# Altium PCB PCB1.pcbdoc
Units mil, origin at the board's own origin, x right, y up, seen from the top; angles counter-clockwise.
Board outline 4812.87 x 3579 mil, 2 copper layers (Top Layer, Bottom Layer); 58 components, 71 nets, 255 pads, 1 vias.
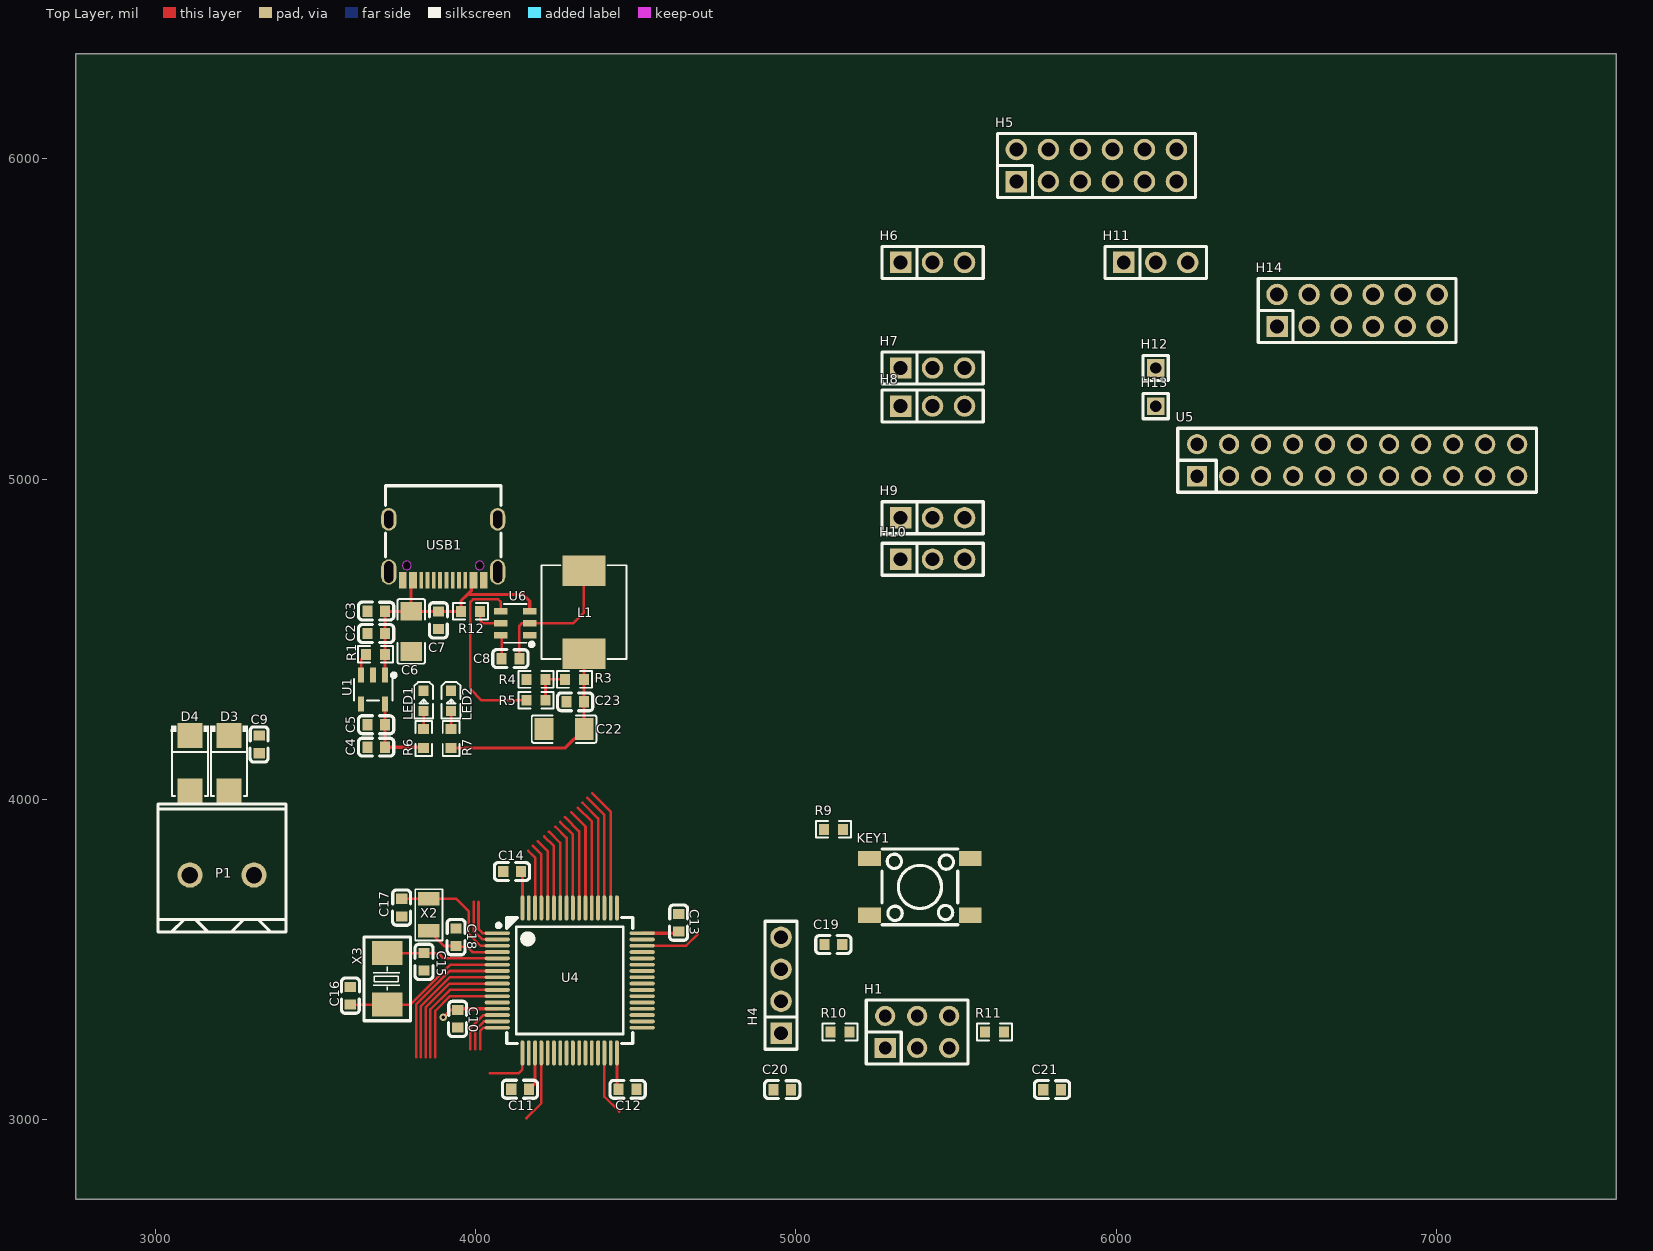
[diagram p0: Top Layer view]
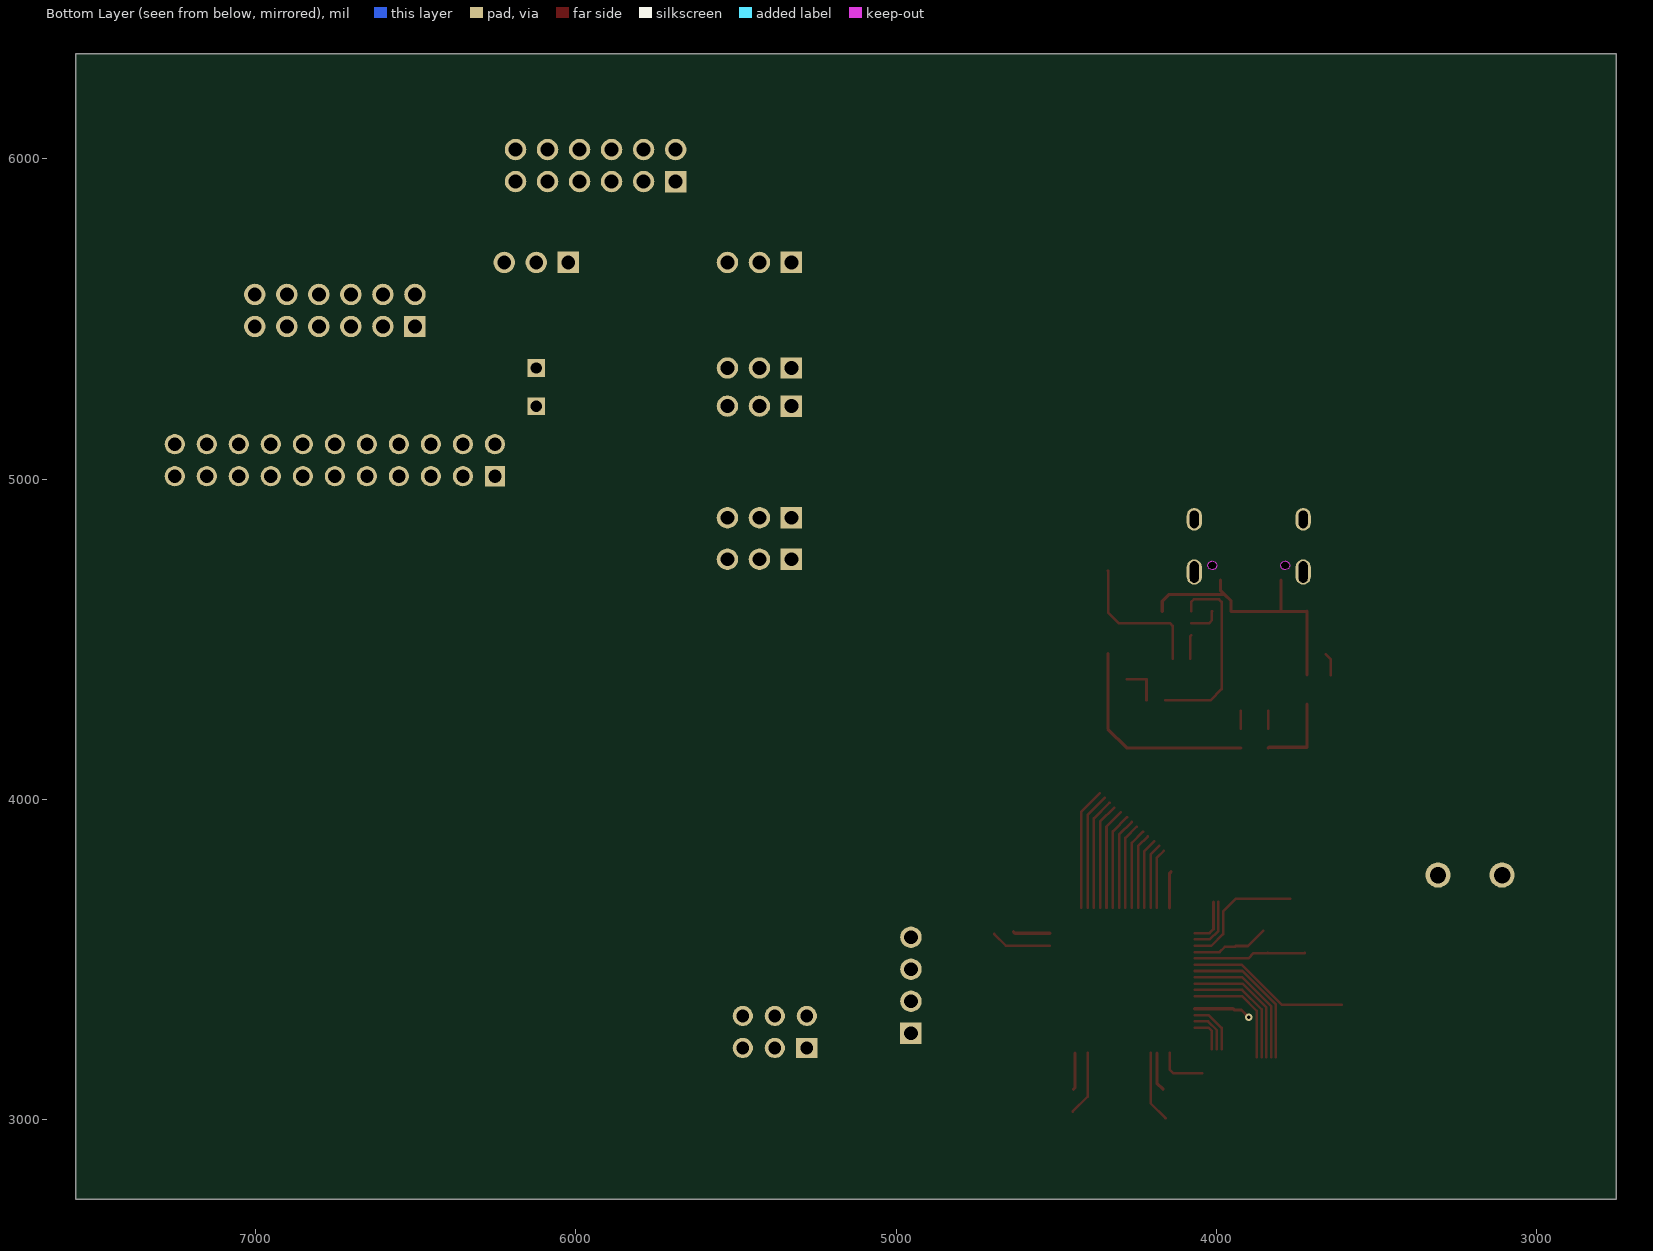
[diagram p1: Bottom Layer view, seen from below]

## Layer stack, top to bottom
Top Layer: signal copper (thickness not stored)
Dielectric: dielectric 12.6, FR-4, Dk 4.8
Bottom Layer: signal copper (thickness not stored)

## Board outline
7562.87,2750 2750,2750 2750,6329 7562.87,6329

## Components (designator, comment, footprint, x,y, rotation, side; value= is the part's Value field where it differs from the comment)
C2 "CAP_0603" C0603 3689.12,4517.44 r0 top
C3 "CAP_0603" C0603 3689.12,4587.44 r0 top
C4 "CAP_0603" C0603 3689.12,4162.44 r0 top
C5 "CAP_0603" C0603 3689.12,4232.44 r0 top
C6 "CAP_1206" C1206 3798.54,4524 r90 top
C7 "CAP_0603" C0603 3883.54,4559.14 r90 top
C8 "CAP_0603" C0603 4108.54,4439 r0 top
C9 "CAP_0603" C0603 3323.54,4171.18 r90 top
C10 "CAP_0603" C0603 3943.54,3314 r90 top
C11 "CAP_0603" C0603 4138.54,3094 r0 top
C12 "CAP_0603" C0603 4473.96,3093.89 r180 top
C13 "CAP_0603" C0603 4633.54,3614 r270 top
C14 "CAP_0603" C0603 4113.54,3774 r0 top
C15 "CAP_0603" C0603 3838.54,3492.25 r90 top
C16 "CAP_0603" C0603 3608.54,3385.95 r270 top
C17 "CAP_0603" C0603 3768.54,3661.64 r90 top
C18 "CAP_0603" C0603 3938.54,3569 r270 top
C19 "CAP_0603" C0603 5117.19,3545.97 r0 top
C20 "CAP_0603" C0603 4957.57,3092.98 r0 top
C21 "CAP_0603" C0603 5800.12,3092.98 r0 top
C22 "CAP_1206" C1206 4275.84,4219 r0 top
C23 "CAP_0603" C0603 4310.98,4304 r0 top
D3 "SS14_C83852" SMA_L4.3-W2.6-LS5.2-RD 3229.34,4112.13 r270 top
D4 "SS14_C83852" SMA_L4.3-W2.6-LS5.2-RD 3107.36,4112.13 r270 top
H1 "HDR-F_2.54_2x3" HDR-TH_6P-P2.54-V-F-R2-C3-S2.54 5378.84,3272.98 r0 top
H4 "PZ254V-11-04P" HDR-TH_4P-P2.54-V-M 4953.54,3419 r90 top
H5 "HDR-F_2.54_2x6" HDR-TH_12P-P2.54-V-M-R2-C6-S2.54 5938.54,5979 r0 top
H6 "HDR-M_2.54_1x3P" HDR-TH_3P-P2.54-V-M 5426.8,5676.48 r0 top
H7 "HDR-M_2.54_1x3P" HDR-TH_3P-P2.54-V-M 5426.8,5346.8 r0 top
H8 "HDR-M_2.54_1x3P" HDR-TH_3P-P2.54-V-M 5426.8,5227.74 r0 top
H9 "HDR-M_2.54_1x3P" HDR-TH_3P-P2.54-V-M 5426.8,4879 r0 top
H10 "HDR-M_2.54_1x3P" HDR-TH_3P-P2.54-V-M 5426.8,4749.32 r0 top
H11 "HDR-M_2.54_1x3P" HDR-TH_3P-P2.54-V-M 6123.81,5676.48 r0 top
H12 "HDR-M_2.54_1x1P" HDR-TH_1P-V-M_XKB_X4611WV-01I-C28D40 6123.81,5346.8 r0 top
H13 "HDR-M_2.54_1x1P" HDR-TH_1P-V-M_XKB_X4611WV-01I-C28D40 6123.81,5227.74 r0 top
H14 "HDR-M_2.54_2x6" HDR-TH_12P-P2.54-V-M-R2-C6-S2.54 6752.87,5526.48 r0 top
KEY1 "6x6x6塑料头" SW-SMD_4P-L6.0-W6.0-P4.50-LS8.6 5387.31,3725.97 r0 top
L1 "MCS0630-2R2MPY1" IND-SMD_L7.3-W6.6 4338.54,4584 r90 top
LED1 "LED_0603-R" LED_0603 3837.6,4305.36 r270 top
LED2 "LED_0603-R" LED_0603 3923.16,4305.36 r270 top
P1 "WJ500V-5.08-2P" CONN-TH_2P-P5.00_WJ500V-5.08-2P 3207.36,3763.03 r0 top
R1 "Res_0603" R0603 3687.02,4452.44 r180 top
R3 "Res_0603" R0603 4308.88,4374 r180 top
R4 "Res_0603" R0603 4188.2,4374 r0 top
R5 "Res_0603" R0603 4188.2,4309 r0 top
R6 "Res_0603" R0603 3837.4,4190.01 r90 top
R7 "Res_0603" R0603 3922.96,4190.01 r90 top
R9 "Res_0603" R0603 5117.19,3905.97 r0 top
R10 "Res_0603" R0603 5137.57,3272.98 r0 top
R11 "Res_0603" R0603 5620.12,3272.98 r0 top
R12 "Res_0603" R0603 3983.54,4586.7 r0 top
U1 "TPRT9013-33GB" SOT-23-5_L3.0-W1.7-P0.95-LS2.8-BL 3679.28,4342.44 r180 top
U4 "STM32F103RCT6TR" LQFP-64_L10.0-W10.0-P0.50-LS12.0-BL 4293.54,3434 r270 top
U5 "PM254-2-11-Z-8.5" HDR-TH_22P-P2.54-V-F-R2-C11-S2.54 6752.87,5058.69 r0 top
U6 "TPMP1470GJ-Z" SOT-23-6_L2.9-W1.6-P0.95-LS2.8-BL 4123.54,4549.3 r90 top
USB1 "KH-TYPE-C-16P" USB-C-SMD_KH-TYPE-C-16P 3898.54,4779 r180 top
X2 "DST310S 32.768KHz" OSC-SMD_L3.2-W1.5 3853.54,3639 r270 top
X3 "X50328MSB2GI" CRYSTAL-SMD_L5.0-W3.2 3723.54,3439.1 r270 top

## Footprints (in the part's own frame and the unit in brackets; to place one, negate y for a bottom-side part, rotate by r counter-clockwise, add the part's x,y. Pads: shape width x height; smd on the part's side, far side on the other; paste and mask are expansions set on the pad)
C0603 [mm]
  rect 0.8x0.9 smd: 1(-0.7,0) 2(0.7,0)
  silkscreen extent -1.41,-0.71 1.39,0.72
C1206 [mm]
  rect 1.485x1.728 smd: 1(-1.593,0) 2(1.593,0)
  silkscreen extent -2.56,-1.09 2.56,1.09
CONN-TH_2P-P5.00_WJ500V-5.08-2P [mm]
  round 2 hole 1.3: 1(-2.54,0) 2(2.54,0)
  silkscreen extent -5.08,-4.52 5.08,5.64
CRYSTAL-SMD_L5.0-W3.2 [mm]
  rect 1.9x2.4 smd: 1(-2.05,0) 2(2.05,0)
  silkscreen extent -3.32,-1.85 3.33,1.85
HDR-TH_1P-V-M_XKB_X4611WV-01I-C28D40 [mm]
  rect 1.4x1.4 hole 0.9: 1(0,0)
  silkscreen extent -1,-1 1,1
HDR-TH_3P-P2.54-V-M [mm]
  rect 1.7x1.7 hole 1.1: 1(-2.54,0)
  round 1.7 hole 1.1: 2(0,0) 3(2.54,0)
  silkscreen extent -4.02,-1.27 4.02,1.27
HDR-TH_4P-P2.54-V-M [mm]
  rect 1.7x1.7 hole 1.1: 1(-3.81,0)
  round 1.7 hole 1.1: 2(-1.27,0) 3(1.27,0) 4(3.81,0)
  silkscreen extent -5.08,-1.27 5.08,1.27
HDR-TH_6P-P2.54-V-F-R2-C3-S2.54 [mm]
  rect 1.7x1.6 hole 1: 1(-2.54,-1.27)
  round 1.6 hole 1: 2(-2.54,1.27) 3(0,-1.27) 4(0,1.27) 5(2.54,-1.27) 6(2.54,1.27)
  silkscreen extent -4.04,-2.54 4.04,2.54
HDR-TH_12P-P2.54-V-M-R2-C6-S2.54 [mm]
  rect 1.7x1.7 hole 1.1: 1(-6.35,-1.27)
  round 1.7 hole 1.1: 2(-6.35,1.27) 3(-3.81,-1.27) 4(-3.81,1.27) 5(-1.27,-1.27) 6(-1.27,1.27) 7(1.27,-1.27) 8(1.27,1.27) 9(3.81,-1.27) 10(3.81,1.27) 11(6.35,-1.27) 12(6.35,1.27)
  silkscreen extent -7.85,-2.54 7.85,2.54
HDR-TH_22P-P2.54-V-F-R2-C11-S2.54 [mm]
  rect 1.6x1.6 hole 1.05: 1(-12.7,-1.27)
  round 1.6 hole 1.05: 2(-12.7,1.27) 3(-10.16,-1.27) 4(-10.16,1.27) 5(-7.62,-1.27) 6(-7.62,1.27) 7(-5.08,-1.27) 8(-5.08,1.27) 9(-2.54,-1.27) 10(-2.54,1.27) 11(0,-1.27) 12(0,1.27) 13(2.54,-1.27) 14(2.54,1.27) 15(5.08,-1.27) 16(5.08,1.27) 17(7.62,-1.27) 18(7.62,1.27) 19(10.16,-1.27) 20(10.16,1.27) 21(12.7,-1.27) 22(12.7,1.27)
  silkscreen extent -14.22,-2.54 14.22,2.54
IND-SMD_L7.3-W6.6 [mm]
  rect 2.424x3.42 smd: 1(3.278,0) 2(-3.278,0)
  silkscreen extent -3.73,-3.38 3.73,3.38
LED_0603 [mil]
  rect 31.5x31.5 smd: 1(-33.5,-0.4) 2(29.5,-0.2)
  silkscreen extent -61,-30 53,30
LQFP-64_L10.0-W10.0-P0.50-LS12.0-BL [mm]
  oval 0.3x2 smd: 1(-3.75,-5.75) 2(-3.25,-5.75) 3(-2.75,-5.75) 4(-2.25,-5.75) 5(-1.75,-5.75) 6(-1.25,-5.75) 7(-0.75,-5.75) 8(-0.25,-5.75) 9(0.25,-5.75) 10(0.75,-5.75) 11(1.25,-5.75) 12(1.75,-5.75) 13(2.25,-5.75) 14(2.75,-5.75) 15(3.25,-5.75) 16(3.75,-5.75) 33(3.75,5.75) 34(3.25,5.75) 35(2.75,5.75) 36(2.25,5.75) 37(1.75,5.75) 38(1.25,5.75) 39(0.75,5.75) 40(0.25,5.75) 41(-0.25,5.75) 42(-0.75,5.75) 43(-1.25,5.75) 44(-1.75,5.75) 45(-2.25,5.75) 46(-2.75,5.75) 47(-3.25,5.75) 48(-3.75,5.75)
  oval 2x0.3 smd: 17(5.75,-3.75) 18(5.75,-3.25) 19(5.75,-2.75) 20(5.75,-2.25) 21(5.75,-1.75) 22(5.75,-1.25) 23(5.75,-0.75) 24(5.75,-0.25) 25(5.75,0.25) 26(5.75,0.75) 27(5.75,1.25) 28(5.75,1.75) 29(5.75,2.25) 30(5.75,2.75) 31(5.75,3.25) 32(5.75,3.75) 49(-5.75,3.75) 50(-5.75,3.25) 51(-5.75,2.75) 52(-5.75,2.25) 53(-5.75,1.75) 54(-5.75,1.25) 55(-5.75,0.75) 56(-5.75,0.25) 57(-5.75,-0.25) 58(-5.75,-0.75) 59(-5.75,-1.25) 60(-5.75,-1.75) 61(-5.75,-2.25) 62(-5.75,-2.75) 63(-5.75,-3.25) 64(-5.75,-3.75)
  silkscreen extent -5,-5.79 5,5
OSC-SMD_L3.2-W1.5 [mm]
  rect 1.05x1.7 smd: 1(-1.275,0) 2(1.275,0)
  silkscreen extent -2.03,-1.08 2.03,1.08
R0603 [mil]
  rect 31.75x34.02 smd: 1(-29.66,0) 2(29.66,0)
  silkscreen extent -55,-26 55,26
SMA_L4.3-W2.6-LS5.2-RD [mm]
  rect 2x2 smd: 1(-2.2,0) 2(2.2,0)
  silkscreen extent -2.98,-1.5 2.6,1.5
SOT-23-5_L3.0-W1.7-P0.95-LS2.8-BL [mm]
  rect 0.49x1.157 smd: 1(-0.95,-1.154) 2(0,-1.154) 3(0.95,-1.154)
  rect 0.49x1.175 smd: 4(0.95,1.154) 5(-0.95,1.154)
  silkscreen extent -1.8,-1.29 1.53,0.85
SOT-23-6_L2.9-W1.6-P0.95-LS2.8-BL [mil]
  rect 20.95x42.2 smd: 1(-37.4,-45.24) 2(0,-45.24) 3(37.4,-45.24) 4(37.4,45.24) 5(0,45.24) 6(-37.4,45.24)
  silkscreen extent -72,-57 61,35
SW-SMD_4P-L6.0-W6.0-P4.50-LS8.6 [mm]
  rect 1.8x1.2 smd: 1(-4,2.25) 2(4,2.25) 3(-4,-2.25) 4(4,-2.25)
  silkscreen extent -3,-3 3,3
USB-C-SMD_KH-TYPE-C-16P [mm]
  oval 1.2x2 hole 0.7 slot 1.7 at 90 deg: 1(-4.32,1.765) 2(4.32,1.765)
  oval 1.2x1.8 hole 0.7 slot 1.4 at 90 deg: 3(-4.32,-2.415) 4(4.32,-2.415)
  rect 0.3x1.3 smd: A1(-3.35,2.415) A4(-2.55,2.415) A5(-1.25,2.415) A6(-0.25,2.415) A7(0.25,2.415) A8(1.25,2.415) A9(2.55,2.415) A12(3.35,2.415) B1(3.05,2.415) B4(2.25,2.415) B5(1.75,2.415) B6(0.75,2.415) B7(-0.75,2.415) B8(-1.75,2.415) B9(-2.25,2.415) B12(-3.05,2.415)
  Multi-Layer board cut-out: -3.24,1.235 -3.192,1.061 -3.064,0.934 -2.89,0.887 -2.716,0.934 -2.588,1.061 -2.54,1.235 -2.54,1.235 -2.588,1.409 -2.716,1.536 -2.89,1.582 -3.064,1.536 -3.192,1.409 -3.24,1.235
  Multi-Layer board cut-out: 2.54,1.235 2.588,1.061 2.716,0.934 2.89,0.887 3.064,0.934 3.192,1.061 3.24,1.235 3.24,1.235 3.192,1.409 3.064,1.536 2.89,1.582 2.716,1.536 2.588,1.409 2.54,1.235
  Multi-Layer keep-out region: -3.24,1.235 -3.192,1.061 -3.064,0.934 -2.89,0.887 -2.716,0.934 -2.588,1.061 -2.54,1.235 -2.54,1.235 -2.588,1.409 -2.716,1.536 -2.89,1.582 -3.064,1.536 -3.192,1.409 -3.24,1.235
  Multi-Layer keep-out region: 2.54,1.235 2.588,1.061 2.716,0.934 2.89,0.887 3.064,0.934 3.192,1.061 3.24,1.235 3.24,1.235 3.192,1.409 3.064,1.536 2.89,1.582 2.716,1.536 2.588,1.409 2.54,1.235
  silkscreen extent -4.57,-5.08 4.57,0.57

## Via types
v1: diameter 24, hole 12, Top Layer to Bottom Layer, 1 vias

## Nets (pads, with @x,y where several pads share a name; then routed paths per layer and width w, separated by ;. In a path a pad name is that pad's centre, name@x,y a point inside that pad or via, vN(x,y) a via of type N, cw(c..) or ccw(c..) an arc to the next point about the centre after c; other vN are vias at no path point)
3V3: C4.2 C5.2 C10.2 C11.2 C12.2 C13.2 C14.2 D3.2 H1.1 H1.2 H4.1 H5.2 H5.3 H5.9 H5.12 R6.1 R9.2 U1.5 U4.13 U4.19 U4.32 U4.48 U4.64 | length 904.2
  Top Layer w10: U1.5 C5.2 C4.2 3835.3,4162.44 R6.1 ; v1(3898.54,3319) 3921.1,3341.56 C10.2 3947.4,3345.42 U4.13 ; C14.2 4145.9,3769.2 U4.64 ; C11.2 4185.27,3113.17 U4.19 ; U4.32 4441.18,3098.8 C12.2@4445.98,3094 ; U4.48 4628.74,3581.64 C13.2
3V3_OUT: C22.2 C23.2 L1.2 R3.1 R7.1 U5.1 | length 675.8
  Top Layer w10: R7.1 4279.88,4160.35 C22.2 C23.2 R3.1 L1.2
5V0: C2.2 C3.2 C6.2 C7.2 R1.1 R12.1 U1.1 U6.3 USB1.A4 USB1.A9 USB1.B4 USB1.B9 | length 881.4
  Top Layer w10: U1.1 R1.1 C2.2 C3.2 3717.42,4586.7 C6.2 ; USB1.A9 3798.14,4587.1 C6.2 ; USB1.B9 3987.12,4652.58 3973.54,4639 ; U6.3 4168.78,4618.76 4148.54,4639 3973.54,4639 ; C6.2 C7.2 R12.1 3953.54,4587.04 3953.54,4619 3973.54,4639
5V0_OUT: U5.2
$1N3041: C9.2 D3.1 D4.1 U4.1 | length 148.7
  Top Layer w8: 4008.54,3679 4008.54,3594 4020.9,3581.64 U4.1
$1N5075: H1.3 R10.2
$1N5130: H1.4 R11.1
$2N1004: R1.2 U1.3 | length 71
  Top Layer w8: U1.3 3641.88,4436.96 R1.2
$2N2072: LED1.2 R6.2 | length 56.2
  Top Layer w8: R6.2 LED1.2
$2N2128: LED2.2 R7.2 | length 56.2
  Top Layer w8: R7.2 LED2.2
$2N7265: R12.2 U6.5 | length 96.6
  Top Layer w8: R12.2 4013.54,4586.36 4013.54,4559 4023.24,4549.3 U6.5
$2N7305: C8.1 U6.6 | length 74
  Top Layer w8: U6.6 4080.98,4509.22 C8.1
$2N7313: C8.2 L1.1 U6.2 | length 453.8
  Top Layer w8: C8.2 4136.1,4541.56 4143.54,4549 4168.48,4549 U6.2 4169.08,4549 4303.54,4549 4337.6,4583.06 4337.6,4714 L1.1
$2N7401: R5.1 U6.4 | length 592.2
  Top Layer w8: U6.4 4078.3,4616 4070.3,4624 3991.54,4624 3983.54,4616 3983.54,4344 4018.54,4309 R5.1
$2N7424: R3.2 R4.2 R5.2 | length 126.4
  Top Layer w8: R5.2 R4.2 R3.2
GND: C2.1 C3.1 C4.1 C5.1 C6.1 C7.1 C9.1 C10.1 C11.1 C12.1 C13.1 C14.1 C15.1 C16.1 C17.1 C18.1 C19.1 C20.1 C21.1 C22.1 C23.1 H1.5 H1.6 H4.4 H5.1 H5.4 H5.10 H5.11 H14.1 H14.2 KEY1.3 KEY1.4 LED1.1 LED2.1 P1.2 R4.1 U1.2 U4.12 U4.18 U4.31 U4.47 U4.63 U5.4 U6.1 USB1.1 USB1.2 USB1.3 USB1.4 USB1.A1 USB1.A12 USB1.B1 USB1.B12
PA0: H6.1 U4.14 | length 166.8
  Top Layer w8: 3983.54,3219 3983.54,3285.47 4023.8,3325.73 U4.14
PA1: H7.1 U4.15 | length 139.8
  Top Layer w8: 3998.54,3219 3998.54,3279 4025.59,3306.05 U4.15
PA2: H8.1 U4.16 | length 115.1
  Top Layer w8: 4013.54,3219 4013.54,3276.36 4023.54,3286.36 U4.16
PA3: H9.1 U4.17 | length 158.7
  Top Layer w8: 4043.54,3144 4133.54,3144 4145.9,3156.36 U4.17
PA4: U4.20 U5.21 | length 222.9
  Top Layer w8: 4158.54,3004 4204.96,3050.42 U4.20
PA5: U4.21 U5.22
PA6: H10.1 U4.22
PA7: H12.1 U4.23
PA8: U4.41 U5.10
PA9: U4.42 U5.7
PA10: U4.43 U5.8
PA11: U4.44 U5.5
PA12: U4.45 U5.6
PA13: H4.2 U4.46 U5.3 | length 188.8
  Top Layer w8: U4.46 4656.81,3542.27 4693.54,3579
PA14: H4.3 H14.3 U4.49
PA15: H14.4 U4.50 | length 382.6
  Top Layer w8: 4363.54,4019 4421.49,3961.05 U4.50
PB0: H13.1 U4.26
PB1: H11.1 U4.27
PB2: C21.2 R11.2 U4.28 U5.17
PB3: H14.5 U4.55 | length 302.1
  Top Layer w8: 4278.54,3944 4323.07,3899.47 U4.55
PB4: H9.3 U4.56 | length 285.1
  Top Layer w8: 4263.54,3929 4303.38,3889.16 U4.56
PB5: H8.2 U4.57 | length 268.2
  Top Layer w8: 4248.54,3914 4283.7,3878.84 U4.57
PB6: H8.3 U4.58 | length 253.3
  Top Layer w8: 4228.54,3899 4264.01,3863.53 U4.58
PB7: H9.2 U4.59 | length 236.4
  Top Layer w8: 4213.54,3884 4244.33,3853.21 U4.59
PB8: H5.6 H5.7 H14.7 U4.61 | length 204.6
  Top Layer w8: 4178.54,3854 4204.96,3827.58 U4.61
PB9: H5.5 H5.8 H14.8 U4.62 | length 187.6
  Top Layer w8: 4163.54,3839 4185.27,3817.27 U4.62
PB10: U4.29 U5.18
PB11: U4.30 U5.15 | length 203
  Top Layer w8: U4.30 4401.81,3070.73 4448.54,3024
PB12: U4.33 U5.16
PB13: U4.34 U5.13
PB14: U4.35 U5.14
PB15: U4.36 U5.11
PC0: H14.11 U4.8 | length 435.8
  Top Layer w8: 3828.54,3194 3828.54,3354 3918.38,3443.84 U4.8
PC1: H11.2 U4.9 | length 409.8
  Top Layer w8: 3843.54,3194 3843.54,3349 3918.7,3424.16 U4.9
PC2: H11.3 U4.10 | length 383.7
  Top Layer w8: 3858.54,3194 3858.54,3344 3919.01,3404.47 U4.10
PC3: H14.12 U4.11 | length 357.6
  Top Layer w8: 3873.54,3194 3873.54,3339 3919.33,3384.79 U4.11
PC4: U4.24 U5.19
PC5: U4.25 U5.20
PC6: U4.37 U5.12
PC7: H10.2 U4.38
PC8: H10.3 U4.39
PC9: U4.40 U5.9
PC10: H6.2 U4.51 | length 365.7
  Top Layer w8: 4348.54,4004 4401.81,3950.73 U4.51
PC11: H6.3 U4.52 | length 348.8
  Top Layer w8: 4333.54,3989 4382.12,3940.42 U4.52
PC12: H7.2 U4.53 | length 331.8
  Top Layer w8: 4318.54,3974 4362.44,3930.1 U4.53
PC13: H14.9 U4.2 | length 174.8
  Top Layer w8: 3993.54,3679 3993.54,3589 4020.59,3561.95 U4.2
PC14: C17.2 U4.3 X2.1 | length 400.5
  Top Layer w8: C17.2 X2.1 3938.34,3689.2 3978.54,3649 3978.54,3579 4015.27,3542.27 U4.3
PC15: C18.2 U4.4 X2.2 | length 241.1
  Top Layer w8: X2.2 3900.9,3541.44 C18.2 3940.98,3539 3973.54,3539 3989.96,3522.58 U4.4
PD2: H7.3 U4.54 | length 316.9
  Top Layer w8: 4298.54,3959 4342.75,3914.79 U4.54
STM32_BOOT0: C20.2 H14.6 R10.1 U4.60 | length 221.5
  Top Layer w8: 4193.54,3869 4224.64,3837.9 U4.60
STM32_OSC_IN: C15.2 U4.5 X3.1 | length 351.8
  Top Layer w8: X3.1 3724.35,3519 C15.2@3839.35,3519 ; C15.2 C15.2@3839.35,3519 ; U4.5 3899.64,3502.9 3883.54,3519 C15.2@3839.35,3519
STM32_OSC_OUT: C16.2 U4.6 X3.2 | length 510.3
  Top Layer w8: C16.2 X3.2 3795.96,3358.39 3920.78,3483.21 U4.6
STM32_RST: C19.2 H14.10 KEY1.1 KEY1.2 R9.1 U4.7 | length 461.9
  Top Layer w8: 3813.54,3194 3813.54,3359 3918.07,3463.53 U4.7
VBAT: D4.2 P1.1
"": U1.4 USB1.A5 USB1.A6 USB1.A7 USB1.A8 USB1.B5 USB1.B6 USB1.B7 USB1.B8